# Altium PCB PCB1.PcbDoc
Units mil, origin at the board's own origin, x right, y up, seen from the top; angles counter-clockwise.
Board outline 1343 x 1071 mil, 2 copper layers (Top Layer, Bottom Layer); 5 components, 10 nets, 27 pads, 3 vias.
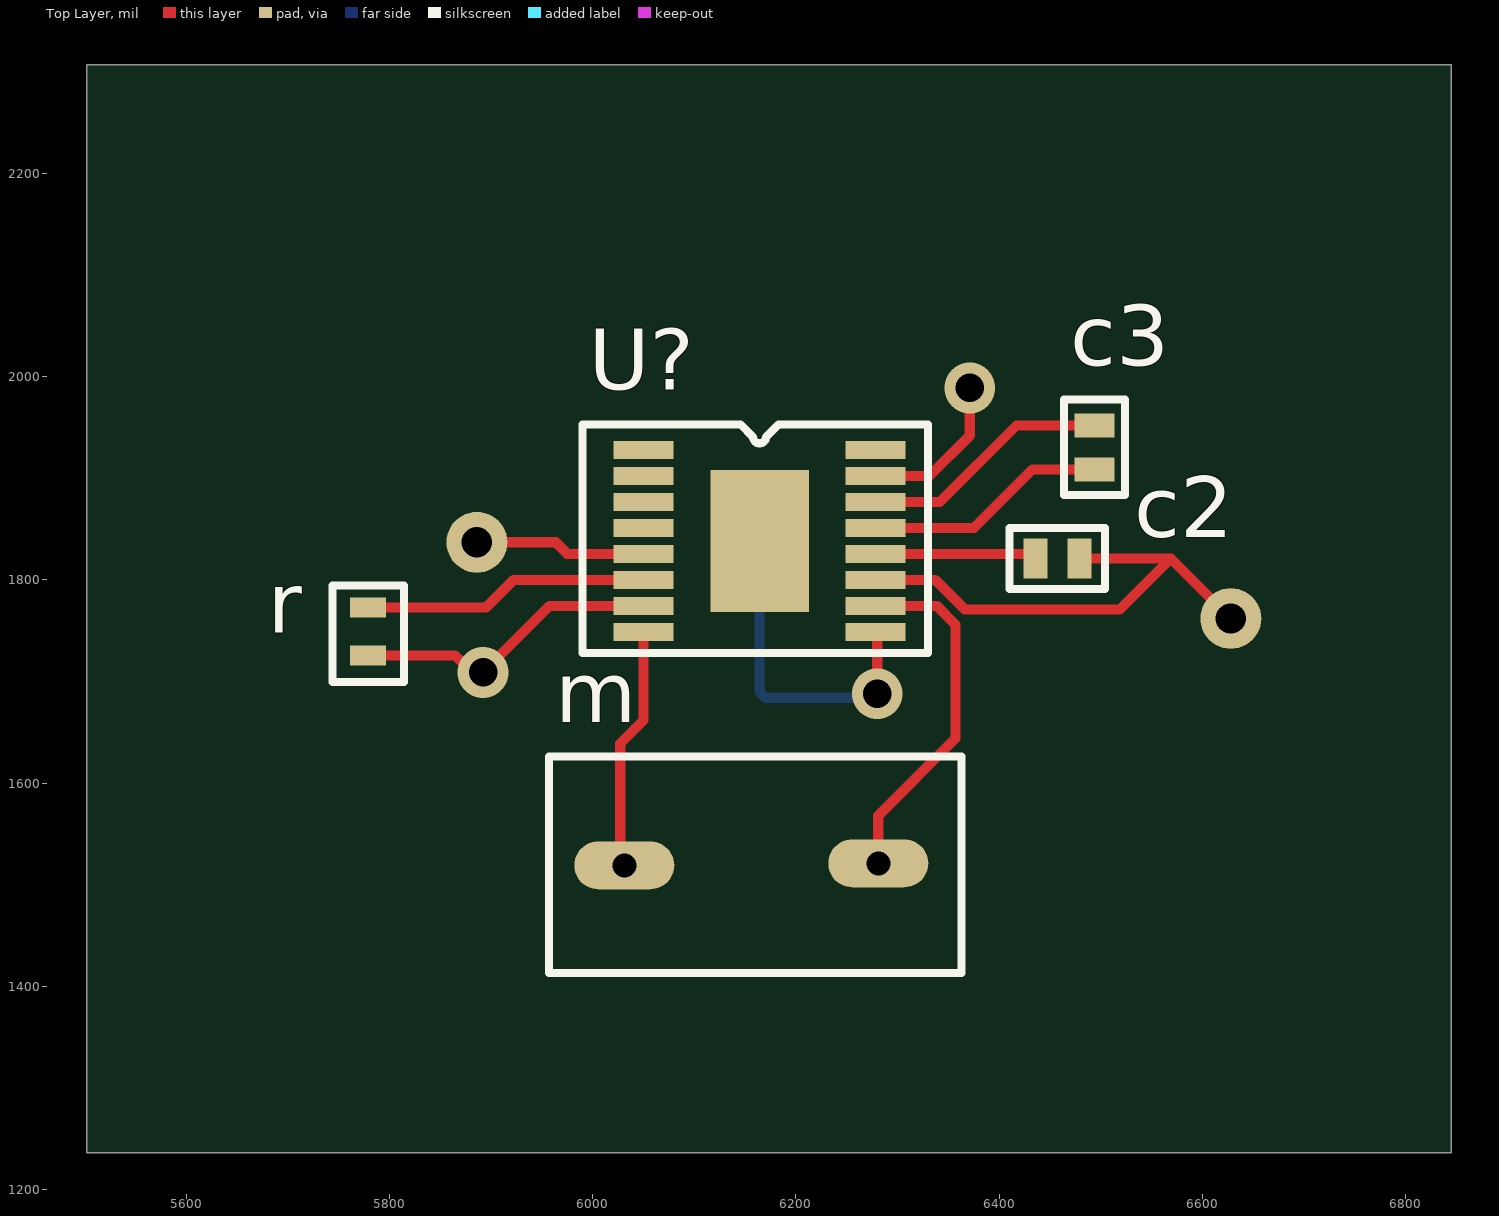
[diagram p0: Top Layer view]
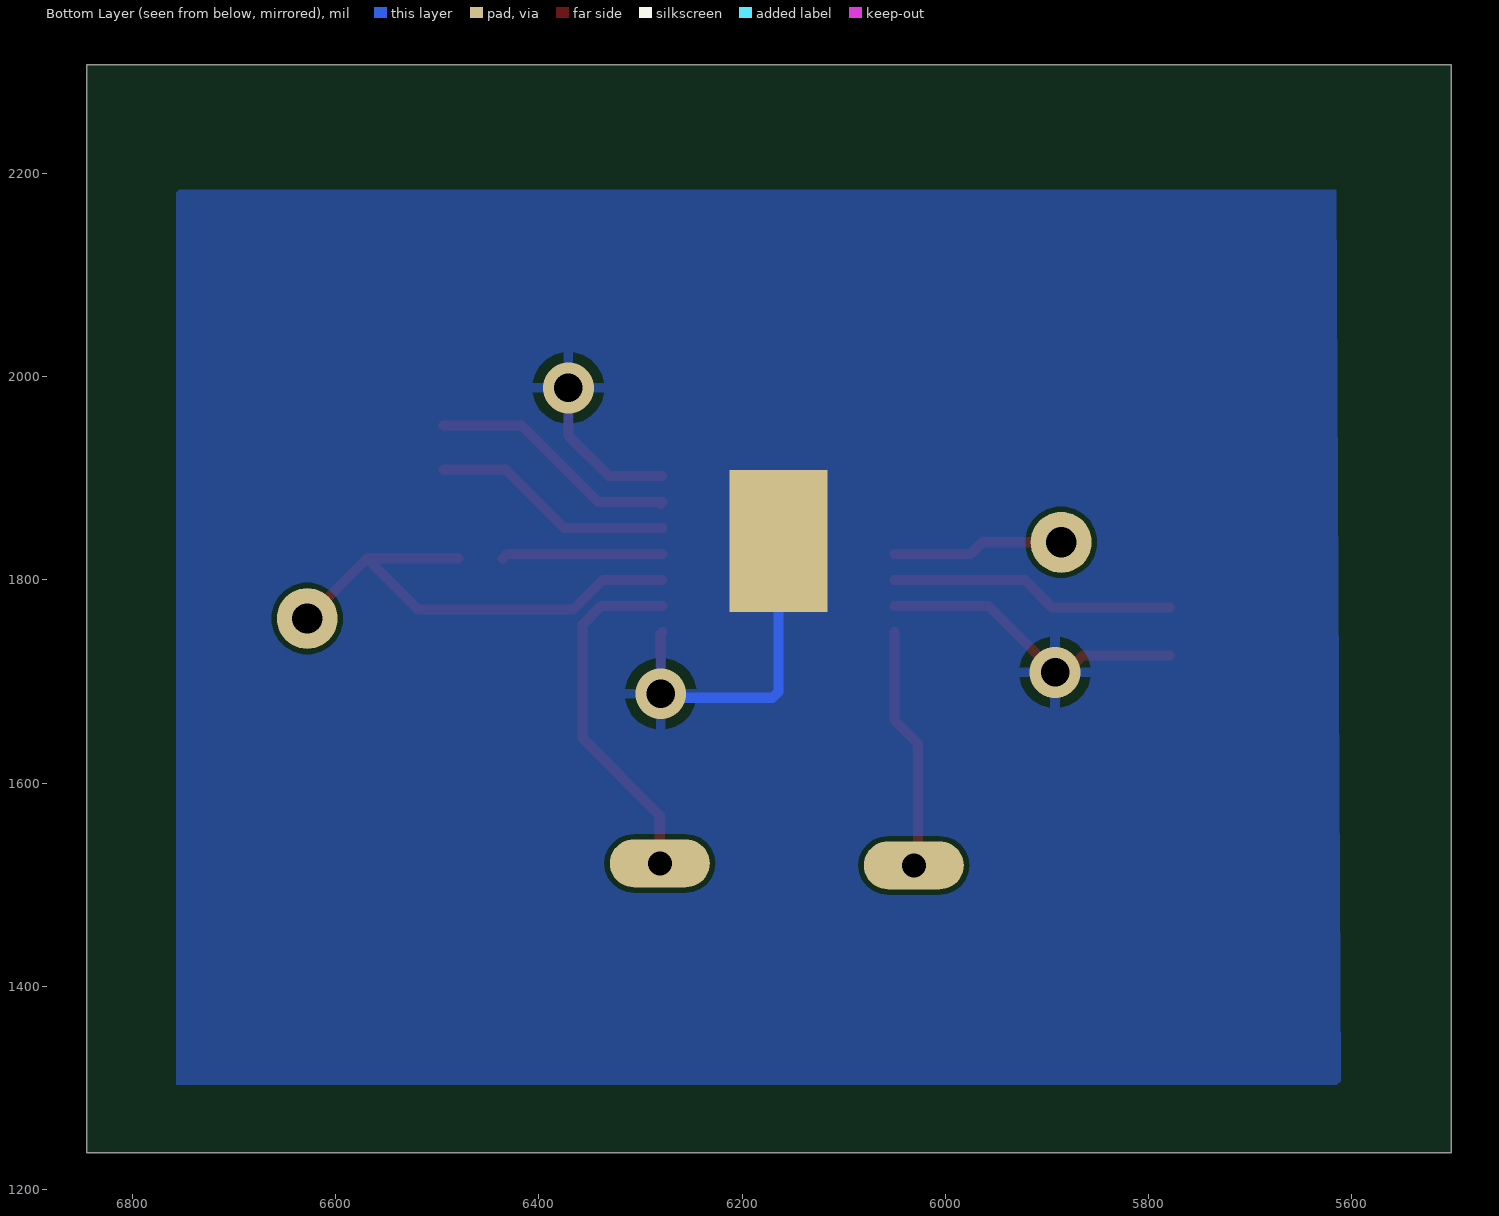
[diagram p1: Bottom Layer view, seen from below]

## Layer stack, top to bottom
Top Solder: solder mask 0.4, Solder Resist, Dk 3.5
Top Layer: signal copper 1.4
Dielectric 1: dielectric 12.6, FR-4, Dk 4.8
Bottom Layer: signal copper 1.4
Bottom Solder: solder mask 0.4, Solder Resist, Dk 3.5

## Board outline
5502,1236 6845,1236 6845,2307 5502,2307

## Design rules (kind name [scope] priority, off if disabled: settings)
Clearance [All] p1: gap=5 ignorepadtopadclearanceinfootprint=FALSE
HoleToHoleClearance [All] p1: gap=5 allowstackedmicrovias=TRUE
MinimumSolderMaskSliver [All] p1: minsoldermaskwidth=5
PolygonConnect [All] p1: connectstyle=Relief reliefconductorwidth=10 reliefentries=4 polygonreliefangle="90 Angle" airgapwidth=10
RoutingVias [All] p1: holewidth=28 width=50 viastyle="Through Hole" minholewidth=28 minwidth=50 maxholewidth=28 maxwidth=50
SilkToSilkClearance [All] p1: silktosilkclearance=5
SilkToSolderMaskClearance [IsPad] p1: minsilkscreentomaskgap=5 clearancetoexposedcopper=TRUE
SolderMaskExpansion [All] p1: expansion=4 istentingtop=FALSE
SupplyNets "Schematic Supply Nets_2" [InNet('GND')] p1: voltage=0.000
SupplyNets "Schematic Supply Nets_1" [InNet('VM')] p2: voltage=0.000
SupplyNets "Schematic Supply Nets" [InNet('+5')] p3: voltage=0.000
Width [All] p1: maxlimit=10 minlimit=5 preferedwidth=10 minimp=50.000000 maximp=50.000000 favimp=50.000000
26 further rules are at their usual default settings.

## Components (designator, comment, footprint, x,y, rotation, side; value= is the part's Value field where it differs from the comment)
c2 "100nF" Capacitor0602#1 6457.35,1821 r180 top
c3 "22nF" Capacitor0602#2 6494,1930.35 r90 top
m "Motor" Motor 6156,1520 r180 top (schematic designator *)
r "R" Resistor0603 5779,1749.38 r270 top
U? "DRV8874" DRV8874 6164.17,1838.43 r0 top

## Footprints (in the part's own frame and the unit in brackets; to place one, negate y for a bottom-side part, rotate by r counter-clockwise, add the part's x,y. Pads: shape width x height; smd on the part's side, far side on the other; paste and mask are expansions set on the pad)
Capacitor0602#1 [mm]
  rect 0.6x1 smd: 26(-0.55,0) 27(0.55,0)
  silkscreen extent -1.19,-0.76 1.19,0.76, body extent -0.8,-0.42 0.8,0.38, height 0.8
Capacitor0602#2 [mm]
  rect 0.6x1 smd: 30(-0.55,0) 31(0.55,0)
  silkscreen extent -1.19,-0.76 1.19,0.76, body extent -0.8,-0.42 0.8,0.38, height 0.8
DRV8874 [mm]
  rect 1.5x0.45 smd: 1(-2.9,2.275) 2(-2.9,1.625) 3(-2.9,0.975) 4(-2.9,0.325) 5(-2.9,-0.325) 6(-2.9,-0.975) 7(-2.9,-1.625) 8(-2.9,-2.275) 9(2.9,-2.275) 10(2.9,-1.625) 11(2.9,-0.975) 12(2.9,-0.325) 13(2.9,0.325) 14(2.9,0.975) 15(2.9,1.625) 16(2.9,2.275)
  rect 2.46x3.55 all layers, no hole: 17(0,0)
  silkscreen extent -4.42,-2.8 4.21,2.91, body extent -3.2,-2.5 3.2,2.5, height 1.2
Motor [mm]
  oval 2.5x1.2 hole 0.6: 53(3.175,0.025) 54(-3.175,-0.025)
  silkscreen extent -5.26,-2.69 5.05,2.72
Resistor0603 [mm]
  rect 0.5x0.9 smd: 1(-0.6,0) 2(0.6,0)
  silkscreen extent -1.14,-0.89 1.27,0.89, body extent -0.8,-0.38 0.8,0.48, height 0.48

## Part data
c2: library part Capacitor0603
c3: library part "Capacitor0603 22n"
U?: Manufacturer="Texas Instruments", Supplier=LCSC

## Free pads (board coordinates)
  round 60 hole 30: 9(5886,1837) 10(6628,1762)

## Via types
v1: diameter 50, hole 28, Top Layer to Bottom Layer, 3 vias

## Nets (pads, with @x,y where several pads share a name; then routed paths per layer and width w, separated by ;. In a path a pad name is that pad's centre, name@x,y a point inside that pad or via, vN(x,y) a via of type N, cw(c..) or ccw(c..) an arc to the next point about the centre after c; other vN are vias at no path point)
+5: pad.9 U?.5 | length 168.7
  Top Layer w10: pad.9 5963.53,1837 5974.9,1825.64 U?.5
GND: r.2 U?.7 U?.9 U?.15 U?.17 | length 791.1
  Top Layer w10: r.2 5864.42,1725.76 5881.18,1709 v1(5892,1709) 5957.46,1774.46 U?.7 ; v1@6276,1684 v1(6280,1688) 6280,1747.21 U?.9 ; U?.15 6331.41,1902.41 6371,1942 v1(6371,1989)
  Bottom Layer w10: U?.17 6164.17,1689.86 6170.03,1684 v1@6276,1684
Net*_53: m.53 U?.8 | length 241
  Top Layer w10: m.53 6027,1523 6027,1639 6050,1662 U?.8
Net*_54: m.54 U?.10 | length 352.8
  Top Layer w10: U?.10 6338.54,1774.46 6357,1756 6357,1644 6281,1568 m.54
Netc2_27: c2.27 U?.12 | length 159.3
  Top Layer w10: U?.12 6431.06,1825.64 c2.27
Netc3_30: c3.30 U?.13 | length 239.5
  Top Layer w10: U?.13 6375.23,1851.23 6432.69,1908.69 c3.30
Netc3_31: c3.31 U?.14 | length 249.4
  Top Layer w10: U?.14@6280.17,1875 U?.14 6341.82,1876.82 6417,1952 c3.31
Netr_1: r.1 U?.6 | length 282.2
  Top Layer w10: r.1 5895.07,1773 5922.12,1800.05 U?.6
NetU?_16: U?.16
VM: c2.26 pad.10 U?.11 | length 496.8
  Top Layer w10: U?.11 6336.95,1800.05 6366,1771 6519,1771 6569,1821 ; c2.26 6569,1821 ; pad.10 6569,1821
pads on no net: U?.1 U?.2 U?.3 U?.4

## Polygon pours and split planes (outlines as drawn)
GND on Bottom Layer "GND_L02_P002" (solid, pour order 2): 5611,1303 6757,1303 6757,2181 6754,2184 5615,2184